# Altium PCB usbc-test-v1.PcbDoc (part 1 of 2)
Units mm, origin at the board's own origin, x right, y up, seen from the top; angles counter-clockwise.
Board outline 60 x 134.37 mm, 2 copper layers (Top Layer, Bottom Layer), stack 0.871 mm thick; 68 components, 63 nets, 626 pads, 262 vias.
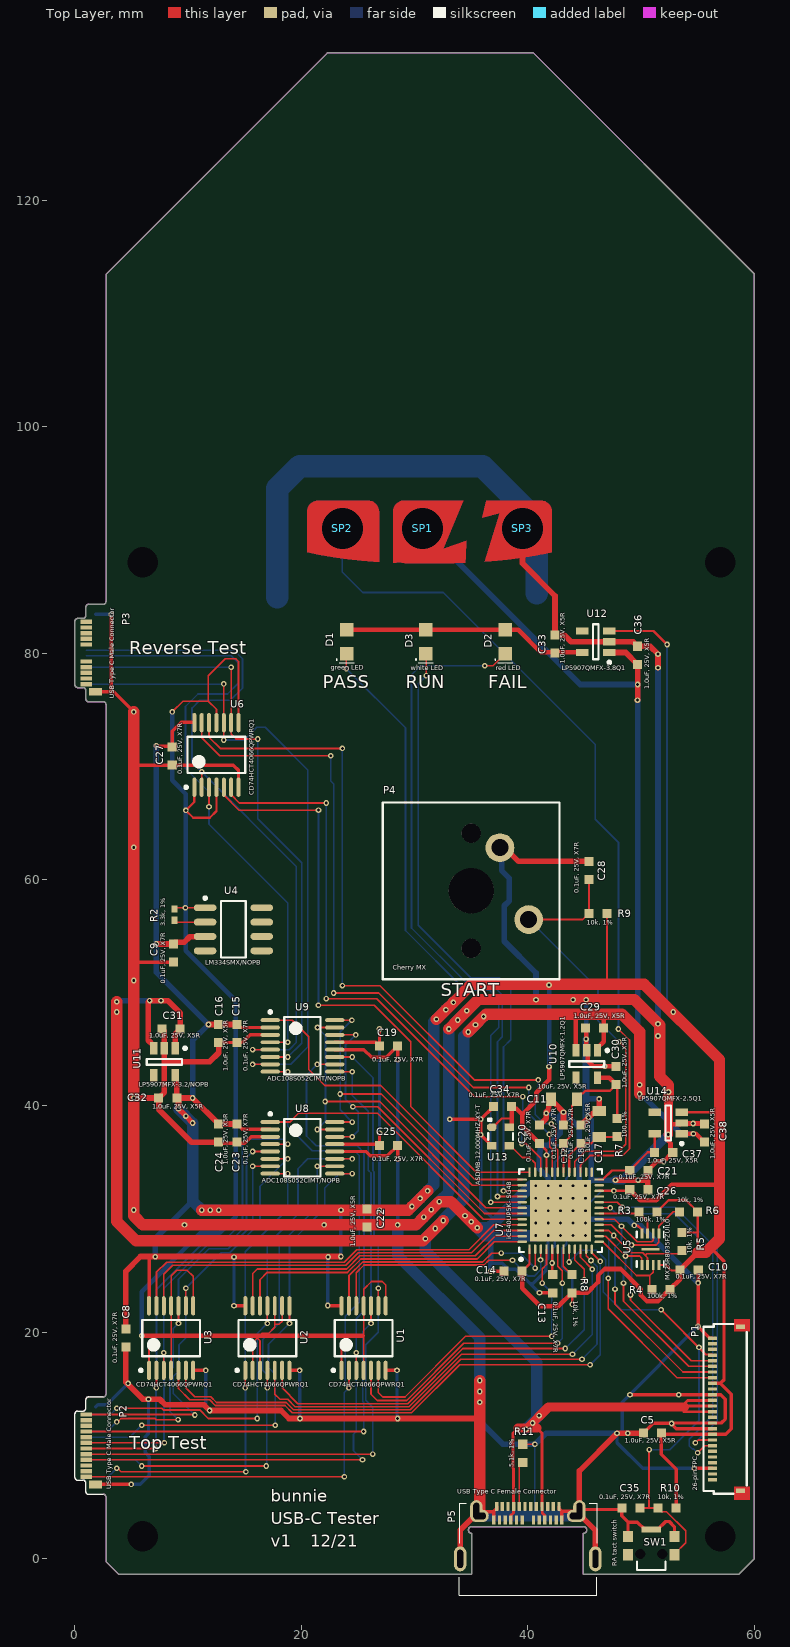
[diagram p0: Top Layer view]
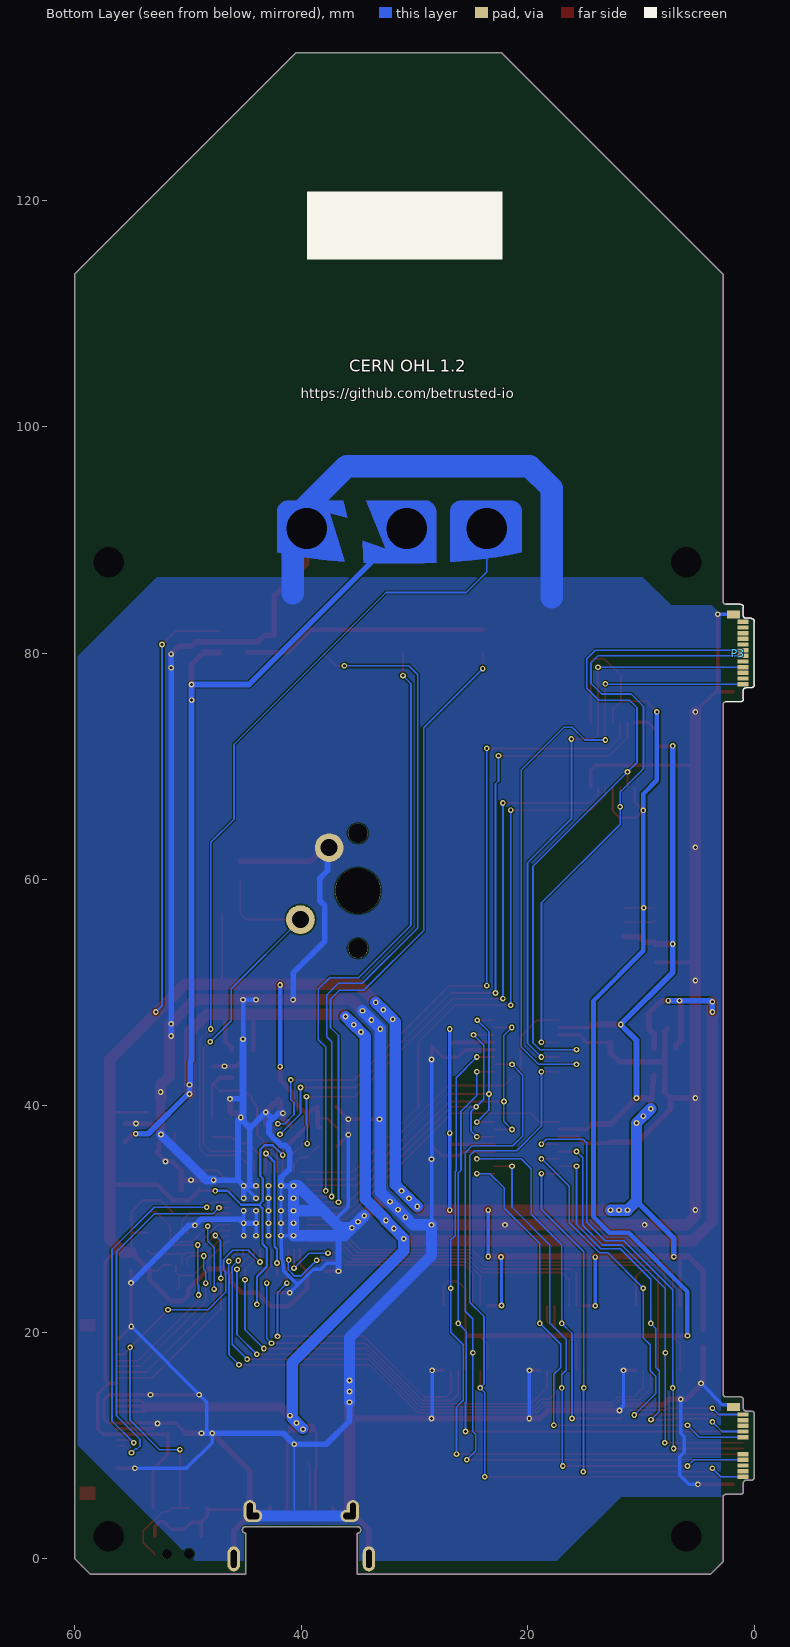
[diagram p1: Bottom Layer view, seen from below]

## Layer stack, top to bottom
Top Solder: solder mask 0.0102, Solder Resist, Dk 3.5
Top Layer: signal copper 0.0356
Dielectric 1: dielectric 0.8, FR-4, Dk 4.8
Bottom Layer: signal copper 0.0356
Bottom Solder: solder mask 0.0102, Solder Resist, Dk 3.5

## Board outline
0,7.2 ccw(c0.25,7.2) 0.25,6.95 0.71,6.95 cw(c0.71,6.7) 0.96,6.7 0.96,5.95 ccw(c1.21,5.95) 1.21,5.7 2.5,5.7 cw(c2.5,5.45) 2.75,5.45 2.75,-0.25 3.87,-1.37 35.06,-1.37 35.06,2.255 35.052,2.255 cw(c35.052,2.555) 35.052,2.855 35.06,2.855 39.98,2.855 44.9,2.855 44.908,2.855 cw(c44.908,2.555) 44.908,2.255 44.9,2.255 44.9,-1.37 58.63,-1.37 60,0 60,113.5 40.5,133 22.3,133 2.75,113.45 2.75,84.55 cw(c2.5,84.55) 2.5,84.3 1.22,84.3 1.21,84.3 ccw(c1.21,84.05) 0.96,84.05 0.96,83.3 cw(c0.71,83.3) 0.71,83.05 0.25,83.05 ccw(c0.25,82.8) 0,82.8 0,77.2 ccw(c0.25,77.2) 0.25,76.95 0.71,76.95 cw(c0.71,76.7) 0.96,76.7 0.96,75.95 ccw(c1.21,75.95) 1.21,75.7 2.5,75.7 cw(c2.5,75.45) 2.75,75.45 2.75,14.55 cw(c2.5,14.55) 2.5,14.3 1.22,14.3 1.21,14.3 ccw(c1.21,14.05) 0.96,14.05 0.96,13.3 cw(c0.71,13.3) 0.71,13.05 0.25,13.05 ccw(c0.25,12.8) 0,12.8

## Design rules (kind name [scope] priority, off if disabled: settings)
Clearance Clearance_1 [InNetClass('DP_90') vs InPolygon] p1: gap=1.5 ignorepadtopadclearanceinfootprint=FALSE except(0: Arc-Hole Track-Hole SMDPad-Hole THPad-Hole Via-Hole Fill-Hole Poly-Hole Region-Hole Text-Hole)
Clearance Clearance_2 [InNet('VBUS') and InPolygon] p2: gap=0.3 ignorepadtopadclearanceinfootprint=FALSE except(0: Arc-Hole Track-Hole SMDPad-Hole THPad-Hole Via-Hole Fill-Hole Poly-Hole Region-Hole Text-Hole)
Clearance [All] p3: gap=0.12 ignorepadtopadclearanceinfootprint=FALSE except(0: Arc-Hole Track-Hole SMDPad-Hole THPad-Hole Via-Hole Fill-Hole Poly-Hole Region-Hole Text-Hole)
DiffPairsRouting [All] p1: maxlimit=0.127 minlimit=0.127 mostfreqgap=0.127 toplayer_minwidth=0.3 toplayer_maxwidth=0.424 toplayer_prefwidth=0.424 bottomlayer_minwidth=0.3 bottomlayer_maxwidth=0.424 bottomlayer_prefwidth=0.424 impedanceprofiledriven=TRUE impedanceprofileid={7CC2B56F-1F2A-4501-830E-6975B203B65A} impedanceprofilevalue=90.000000 maxuncoupledlength=12.7
HoleSize [All] p1: absolutevalues=TRUE maxlimit=8 minlimit=0.025 maxpercent=80.000 minpercent=20.000
MinimumSolderMaskSliver [All] p1 off: minsoldermaskwidth=0.07
PolygonConnect [All] p1: connectstyle=Direct reliefconductorwidth=0.254 reliefentries=4 polygonreliefangle="90 Angle" airgapwidth=0.254
RoomDefinition tester [InComponentClass('tester')] p1 off: confinementstyle=ConfineIn formatcopy=TRUE lockcomponents=FALSE outline 80.01,20 81.661,20 81.661,14 80.01,14
RoutingVias [All] p1: holewidth=0.25 width=0.5 viastyle="Through Hole" minholewidth=0.25 minwidth=0.5 maxholewidth=1 maxwidth=2
SilkToSilkClearance [All] p1 off: silktosilkclearance=0.254
SilkToSolderMaskClearance [IsPad] p1 off: minsilkscreentomaskgap=0.254 clearancetoexposedcopper=TRUE
SolderMaskExpansion [All] p1: expansion=0.075 istentingtop=FALSE
Width [All] p1: maxlimit=5 minlimit=0.125 preferedwidth=0.15
25 further rules are at their usual default settings.

## Components (designator, comment, footprint, x,y, rotation, side; value= is the part's Value field where it differs from the comment)
C5 "1.0uF, 25V, X5R" B_CAP0603 51,11.1 r0 top
C8 "0.1uF, 25V, X7R" B_CAP0603 4.5,19.5 r270 top
C9 "0.1uF, 25V, X7R" B_CAP0603 8.7,53.5 r270 top
C10 "0.1uF, 25V, X7R" B_CAP0603 54.25,25.5 r0 top
C11 "10uF, 25V, X5R" B_CAP0805 43.2,40.6 r180 top
C12 "0.1uF, 25V, X7R" B_CAP0603 43.15,37.5 r90 top
C13 "0.1uF, 25V, X7R" B_CAP0603 42.2,24.3 r270 top
C14 "0.1uF, 25V, X7R" B_CAP0603 38.7,25.4 r180 top
C15 "0.1uF, 25V, X7R" B_CAP0603 14.3,46.4 r270 top
C16 "1.0uF, 25V, X5R" B_CAP0603 12.7,46.4 r90 top
C17 "10uF, 25V, X5R" B_CAP0805 46.3,38.4 r90 top
C18 "0.1uF, 25V, X7R" B_CAP0603 44.7,37.5 r90 top
C19 "0.1uF, 25V, X7R" B_CAP0603 27.7,45.3 r0 top
C20 "0.1uF, 25V, X7R" B_CAP0603 41.025,37.5 r90 top
C21 "0.1uF, 25V, X7R" B_CAP0603 49.8,34.3 r0 top
C22 "1.0uF, 25V, X5R" B_CAP0603 25.8,30.1 r90 top
C23 "0.1uF, 25V, X7R" B_CAP0603 14.3,37.6 r270 top
C24 "1.0uF, 25V, X5R" B_CAP0603 12.7,37.6 r90 top
C25 "0.1uF, 25V, X7R" B_CAP0603 27.7,36.5 r0 top
C26 "0.1uF, 25V, X7R" B_CAP0603 49.8,32.6 r0 top
C27 "0.1uF, 25V, X7R" B_CAP0603 8.6,70.9 r270 top
C28 "0.1uF, 25V, X7R" B_CAP0603 45.4,60.8 r90 top
C29 "1.0uF, 25V, X5R" B_CAP0603 45.9,46.9 r0 top
C30 "1.0uF, 25V, X5R" B_CAP0603 47.8,42.7 r270 top
C31 "1.0uF, 25V, X5R" B_CAP0603 8.5,46.8 r0 top
C32 "1.0uF, 25V, X5R" B_CAP0603 8.2,40.7 r0 top
C33 "1.0uF, 25V, X5R" B_CAP0603 42.4,80.8 r270 top
C34 "0.1uF, 25V, X7R" B_CAP0603 37.775,39.95 r180 top
C35 "0.1uF, 25V, X7R" B_CAP0603 49.1,4.5 r180 top
C36 "1.0uF, 25V, X5R" B_CAP0603 49.7,79.8 r270 top
C37 "1.0uF, 25V, X5R" B_CAP0603 52,35.9 r180 top
C38 "1.0uF, 25V, X5R" B_CAP0603 55.6,37.6 r270 top
D1 "green LED" B_LED0805 24,81 r90 top
D2 "red LED" B_LED0805 38,81 r90 top
D3 "white LED" B_LED0805 31,81 r90 top
P1 "26-pin FPC" HRS_FH34SRJ-26S-0.5SH(50) 56.3,13.25 r90 top
P2 "USB Type C Male Connector" MOLEX_1054440001 0,10 r90 top
P3 "USB Type C Male Connector" MOLEX_1054440001 0,80 r270 bottom
P4 "Cherry MX" CHERRY_MX_BASIC 35,59 r270 top
P5 "USB Type C Female Connector" TE_1-2295018-2 40,0 r0 top
R2 "3.3k, 1%" B_RES0402 8.8,56.9 r270 top
R3 "100k, 1%" B_RES0603 50.6,30.65 r180 top
R4 "100k, 1%" B_RES0603 51.75,23.8 r180 top
R5 "10k, 1%" B_RES0603 53.6,28.025 r270 top
R6 "10k, 1%" B_RES0603 54.2,30.65 r180 top
R7 "100, 1%" B_RES0603 47.9,38.1 r270 top
R8 "10k, 1%" B_RES0603 43.9,24.3 r90 top
R9 "10k, 1%" B_RES0603 46.2,57 r180 top
R10 "10k, 1%" B_RES0603 52.3,4.5 r180 top
R11 "5.1k, 1%" B_RES0603 39.55,9.325 r270 top
SP1 "sticker pad (DNP)" TP_SMT_38mil 30.7,91 r90 top
SP2 "sticker pad (DNP)" TP_SMT_38mil 23.625,91 r90 top
SP3 "sticker pad (DNP)" TP_SMT_38mil 39.525,91 r90 top
SW1 "RA tact switch" CK_KMS221GPLFS 50.9,-0.125 r0 top
U1 "CD74HCT4066QPWRQ1" TSOP65P640-14AN 25.5,19.5 r90 top
U2 "CD74HCT4066QPWRQ1" TSOP65P640-14AN 17,19.5 r90 top
U3 "CD74HCT4066QPWRQ1" TSOP65P640-14AN 8.5,19.5 r90 top
U4 "LM334SMX/NOPB" SOIC127P600-8AN 14,55.6 r0 top
U5 "MX25R8035FZUIL0" USON-8 50.825,27.35 r270 top
U6 "CD74HCT4066QPWRQ1" TSOP65P640-14AN 12.5,71 r90 top
U7 "iCE40UP5K- SG48" UP5K_QFN127P600-8N 42.9,30.75 r90 top
U8 "ADC108S052CIMT/NOPB" SOP65P640-16N 20.1,36.3 r0 top
U9 "ADC108S052CIMT/NOPB" SOP65P640-16N 20.1,45.3 r0 top
U10 "LP5907QMFX-1.2Q1" SOT23-5AN 45.2,43.7 r270 top
U11 "LP5907MFX-3.2/NOPB" SOT23-5AN 7.9,43.9 r270 top
U12 "LP5907QMFX-3.8Q1" SOT23-5AN 46,81 r180 top
U13 "ASDMB-12.000MHZ-XY-T" ABRACON_ASDMB 37.6,37.3 r270 top
U14 "LP5907QMFX-2.5Q1" SOT23-5AN 52.4,38.5 r180 top

## Footprints (in the part's own frame and the unit in brackets; to place one, negate y for a bottom-side part, rotate by r counter-clockwise, add the part's x,y. Pads: shape width x height; smd on the part's side, far side on the other; paste and mask are expansions set on the pad)
ABRACON_ASDMB [mm] "Abracon Miniature Pure Silicon Clock Oscillator"
  oct 0.65x0.85 smd mask+0.07: 1(-0.825,-0.775)
  rect 0.65x0.85 smd mask+0.07: 2(0.825,-0.775) 3(0.825,0.775) 4(-0.825,0.775)
  silkscreen extent -1.6,-1.1 0.3,1.1, body extent -1.25,-1 1.25,1, height 0.85
B_CAP0603 [mm] "Capacitor 0603"
  rect 0.8x0.8 smd mask+0.07: 1(-0.8,0) 2(0.8,0)
  body extent -0.85,-0.45 0.85,0.45, height 0.9
B_CAP0805 [mm] "Capacitor 0805"
  rect 0.9x1.2 smd: 1(-1.15,0) 2(1.15,0)
  body extent -1.1,-0.7 1.1,0.7, height 0.6
B_LED0805 [mm] "Molded Diode, 2-Leads, Body 2.00x1.25mm, IPC Medium Density"
  rect 1.2x1.2 smd mask+0.07: 1(1.05,0) 2(-1.05,0)
  silkscreen extent -1.85,-0.65 -1.53,0.92, body extent -1,-0.63 1,0.63, height 0.8
B_RES0402 [mm] "Resistor 0402"
  rect 0.63x0.55 smd mask+0.07: 1(-0.5,0) 2(0.5,0)
  body extent -0.53,-0.27 0.53,0.28, height 0.4
B_RES0603 [mm] "Resistor 0603"
  rect 0.8x0.8 smd mask+0.07: 1(-0.8,0) 2(0.8,0)
  body extent -0.85,-0.45 0.85,0.45, height 0.9
CHERRY_MX_BASIC [mil] "Cherry MX key switch with fixation pins"
  round 67 hole 67 unplated: 0(-200,0) 0(200,0)
  round 157 hole 157 unplated: 0(0,0)
  round 100 hole 59: 1(-150,100) 2(100,200)
  silkscreen extent -307,-307 307,307, body extent -307,-307 307,307, height 610
CK_KMS221GPLFS [mm] "RA tact switch gull wing with pegs"
  round 0.8 hole 0.9 unplated mask+0.07: 0(-0.975,0.55) 0(0.975,0.55)
  rect 0.9x1 smd mask+0.07: 1(-2.05,0.5) 2(-2.05,2.1) 4(2.05,2.1) 5(2.05,0.5)
  rect 1.7x0.55 smd mask+0.07: 3(0,2.725)
  silkscreen extent -1.25,-0.85 1.25,-0.13, body extent -2.3,-0.85 2.3,2.7, height 1.42
HRS_FH34SRJ-26S-0.5SH(50) [mm] "Top/bottom entry, back-lock 0.3mm thick FPC, 26 pins"
  rect 0.4x0.8 smd mask+0.07: 0(-7.25,-2.5) 0(7.25,-2.5)
  rect 0.3x0.8 smd mask+0.07: 1(6.25,0) 2(5.75,0) 3(5.25,0) 4(4.75,0) 5(4.25,0) 6(3.75,0) 7(3.25,0) 8(2.75,0) 9(2.25,0) 10(1.75,0) 11(1.25,0) 12(0.75,0) 13(0.25,0) 14(-0.25,0) 15(-0.75,0) 16(-1.25,0) 17(-1.75,0) 18(-2.25,0) 19(-2.75,0) 20(-3.25,0) 21(-3.75,0) 22(-4.25,0) 23(-4.75,0) 24(-5.25,0) 25(-5.75,0) 26(-6.25,0)
  silkscreen extent -7.5,-3.03 7.5,0.77, body extent -7.5,-3.03 7.5,0.78, height 1
MOLEX_1054440001 [mm] "USB C Plug, splint"
  rect 0.7x1.15 smd mask+0.05: 0(-3.42,-1.84)
  rect 0.7x1.15 smd far side mask+0.05: 0(3.42,-1.84)
  rect 0.38x1 smd mask+0.05: A1(-2.75,-1) A2(-2.25,-1) A3(-1.75,-1) A4(-1.25,-1) A5(-0.75,-1) A6(-0.25,-1) A7(0.25,-1) A8(0.75,-1) A9(1.25,-1) A10(1.75,-1) A11(2.25,-1) A12(2.75,-1)
  rect 0.38x1 smd far side mask+0.05: B1(2.75,-1) B2(2.25,-1) B3(1.75,-1) B4(1.25,-1) B5(0.75,-1) B8(-0.75,-1) B9(-1.25,-1) B10(-1.75,-1) B11(-2.25,-1) B12(-2.75,-1)
  silkscreen extent -4.3,-2.5 4.3,0, body extent -4.59,-2.02 4.59,10.02, height 1.34
SOIC127P600-8AN [mm] "SOIC, 8-Leads, Body 4.9x3.9mm, Pitch 1.27mm, IPC Medium Density"
  oval 2x0.6 smd: 1(-2.5,1.905) 2(-2.5,0.635) 3(-2.5,-0.635) 4(-2.5,-1.905) 5(2.5,-1.905) 6(2.5,-0.635) 7(2.5,0.635) 8(2.5,1.905)
  silkscreen extent -2.62,-2.5 1.1,2.88, body extent -2,-2.5 2,2.5, height 2.72
SOP65P640-16N [mm] "SOP, 16-Leads, Body 5x4.4mm, Pitch 0.65mm, IPC Medium Density"
  oval 1.7x0.35 smd: 1(-2.85,2.275) 2(-2.85,1.625) 3(-2.85,0.975) 4(-2.85,0.325) 5(-2.85,-0.325) 6(-2.85,-0.975) 7(-2.85,-1.625) 8(-2.85,-2.275) 9(2.85,-2.275) 10(2.85,-1.625) 11(2.85,-0.975) 12(2.85,-0.325) 13(2.85,0.325) 14(2.85,0.975) 15(2.85,1.625) 16(2.85,2.275)
  silkscreen extent -2.97,-2.55 1.6,3.12, body extent -2.25,-2.55 2.25,2.55, height 2
SOT23-5AN [mm] "SOT23, 5-Leads, Body 2.9x1.6mm, Pitch 0.95mm, Lead Span 2.8mm, IPC Medium Density"
  rect 1.1x0.65 smd mask+0.075: 1(-1.2,0.95) 2(-1.2,0) 3(-1.2,-0.95) 4(1.2,-0.95) 5(1.2,0.95)
  silkscreen extent -1.32,-1.55 0.25,1.95, body extent -0.9,-1.55 0.9,1.55, height 1.45
TE_1-2295018-2 [mm] "USB-C receptacle 24 position board cutout"
  oval 1.1x1.95 hole 0.5 slot 1.45 at 90 deg mask+0.07: 0(-4.55,4.22) 0(4.55,4.22)
  oval 1.6x1.1 hole 0.6 slot 1.1 at 0 deg mask+0.07: 0(-4.25,3.792) 0(4.25,3.792)
  rect 0.3x0.8 smd mask+0.07: A1(-2.75,4.63) A2(-2.25,4.63) A3(-1.75,4.63) A4(-1.25,4.63) A5(-0.75,4.63) A6(-0.25,4.63) A7(0.25,4.63) A8(0.75,4.63) A9(1.25,4.63) A10(1.75,4.63) A11(2.25,4.63) A12(2.75,4.63) B1(3,3.43) B2(2.5,3.43) B3(2,3.43) B4(1.5,3.43) B5(1,3.43) B6(0.5,3.43) B7(-0.5,3.43) B8(-1,3.43) B9(-1.5,3.43) B10(-2,3.43) B11(-2.5,3.43) B12(-3,3.43)
  oval 1.1x2.2 hole 0.5 slot 1.6 at 90 deg mask+0.07: MID(-5.97,0) MID(5.97,0)
  silkscreen extent -6.08,-3.2 6.07,4.9, body extent -6.07,-3.2 6.07,4.9, height 2.45
TP_SMT_38mil [mil] "38 mil round test point, SMT"
  round 38 smd: 1(0,0)
TSOP65P640-14AN [mm] "TSOP, 14-Leads, Body 5x4.4mm, Pitch 0.65mm, IPC Medium Density"
  oval 1.7x0.35 smd: 1(-2.85,1.95) 2(-2.85,1.3) 3(-2.85,0.65) 4(-2.85,0) 5(-2.85,-0.65) 6(-2.85,-1.3) 7(-2.85,-1.95) 8(2.85,-1.95) 9(2.85,-1.3) 10(2.85,-0.65) 11(2.85,0) 12(2.85,0.65) 13(2.85,1.3) 14(2.85,1.95)
  silkscreen extent -2.97,-2.55 1.6,2.8, body extent -2.25,-2.55 2.25,2.55, height 1.2
UP5K_QFN127P600-8N [mm]
  oval 0.85x0.2 smd: 1(-3.4,2.75) 2(-3.4,2.25) 3(-3.4,1.75) 4(-3.4,1.25) 5(-3.4,0.75) 6(-3.4,0.25) 7(-3.4,-0.25) 8(-3.4,-0.75) 9(-3.4,-1.25) 10(-3.4,-1.75) 11(-3.4,-2.25) 12(-3.4,-2.75) 25(3.4,-2.75) 26(3.4,-2.25) 27(3.4,-1.75) 28(3.4,-1.25) 29(3.4,-0.75) 30(3.4,-0.25) 31(3.4,0.25) 32(3.4,0.75) 33(3.4,1.25) 34(3.4,1.75) 35(3.4,2.25) 36(3.4,2.75)
  oval 0.2x0.85 smd: 13(-2.75,-3.4) 14(-2.25,-3.4) 15(-1.75,-3.4) 16(-1.25,-3.4) 17(-0.75,-3.4) 18(-0.25,-3.4) 19(0.25,-3.4) 20(0.75,-3.4) 21(1.25,-3.4) 22(1.75,-3.4) 23(2.25,-3.4) 24(2.75,-3.4) 37(2.75,3.4) 38(2.25,3.4) 39(1.75,3.4) 40(1.25,3.4) 41(0.75,3.4) 42(0.25,3.4) 43(-0.25,3.4) 44(-0.75,3.4) 45(-1.25,3.4) 46(-1.75,3.4) 47(-2.25,3.4) 48(-2.75,3.4)
  rect 5.4x5.4 smd: PADDLE(0,0)
  silkscreen extent -4.42,-3.65 3.65,3.65, body extent -3.5,-3.5 3.5,3.5, height 1
USON-8 [mm] "SON, 8-Leads, Body 2.00x3.00mm, Pitch 0.50mm, Thermal Pad 1.60x0.20mm, IPC Medium Density"
  rect 0.9x0.25 smd mask+0.07: 1(-1.395,0.75) 2(-1.395,0.25) 3(-1.395,-0.25) 4(-1.395,-0.75) 5(1.395,-0.75) 6(1.395,-0.25) 7(1.395,0.25) 8(1.395,0.75)
  rect 0.2x1.6 smd mask+0.07: 9(0,0)
  silkscreen extent -2,-1.2 1.55,1.25, body extent -1.55,-1.05 1.55,1.05, height 0.6

## Part data
C5 C16 C22 C24 C29 C30 C31 C32 C33 C36 C37 C38: library part "Cap Semi", "Capacitor (Semiconductor SIM Model)", MPN=CL10A105KA8NNNC, MYPN=C-105-25-X5R-0603, VENDOR=Samsung
C8 C9 C10 C12 C13 C14 C15 C18 C19 C20 C21 C23 C25 C26 C27 C28 C34 C35: library part "Cap Semi", "Capacitor (Semiconductor SIM Model)", MPN=CC0603KRX7R8BB104, MYPN=C-104-25-X7R-0603, VENDOR=Murata
C11 C17: library part "Cap Semi", "Capacitor (Semiconductor SIM Model)", MPN=GRM21BR61E106KA73L, MYPN=C-106-25-X5R-0805, VENDOR=Murata
D1: library part LED2, "Typical RED, GREEN, YELLOW, AMBER GaAs LED", MPN=IN-S85ATG, MYPN=D-LED-GREEN1-0805, VENDOR=Inolux
D2: library part LED2, "Typical RED, GREEN, YELLOW, AMBER GaAs LED", MPN=IN-S85ATR, MYPN=D-LED-RED1-0805, VENDOR=Inolux
D3: library part LED2, "Typical RED, GREEN, YELLOW, AMBER GaAs LED", MPN=IN-S85AT5UW, MYPN=D-LED-WHITE1-0805, VENDOR=Inolux
P1: library part FPC-26, "26 Pin FPC header", MPN=FH34SRJ-26S-0.5SH(99), MYPN=J-FPC-0.5mm-26-0.3mm-T/B, VENDOR=Hirose
P2 P3: library part USB_TYPE_C, "USB Type C Connector", MPN=1054440011, MYPN=P-1054440001, VENDOR=Molex
P4: library part "Header 2", "Header, 2-Pin", MPN=MX1A-E1NN, LatestRevisionDate=17-Jul-2002, LatestRevisionNote="Re-released for DXP Platform.", MYPN=SW-EVQ-P6DB35, Publisher="Altium Limited", VENDOR=Cherry
P5: library part USB_TYPE_C, "USB Type C Connector", MPN=1-2295018-2, MYPN=P-1-2295018-2, VENDOR="TE Connectivity AMP Connectors"
R2 R3 R4 R7: library part Res1, "Resistor", MPN=TBD, VENDOR=Yageo
  R2: MYPN=R-332-1P-1_16W-0402
  R3 R4: MYPN=R-104-1P-1_16W-0603
  R7: MYPN=R-101-1P-1_16W-0603
R5 R6 R8 R9 R10: library part Res1, "Resistor", MPN=RC0603FR-0710KL, MYPN=R-103-1P-1_16W-0603, VENDOR=Yageo
R11: library part Res1, "Resistor", MPN=RC0603FR-075K1L, MYPN=R-512-1P-1_16W-0603, VENDOR=Yageo
SP1 SP2 SP3: library part CON1, "Connector"
SW1: library part "Header 5", MPN=KMS221GPLFS, LatestRevisionDate=17-Jul-2002, LatestRevisionNote="Re-released for DXP Platform.", MYPN=SW-KMS221GPLFS, Publisher="Altium Limited", VENDOR=C&K
U1 U2 U3 U6: library part 74HC4066, "4-channel analog mux", MPN=CD74HCT4066QPWRQ1, VENDOR=TI
U4: library part LMx34, "LM134/234/334 3-terminal adjustable current sources", MPN=LM334SMX/NOPB, VENDOR=TI
U5: library part EN25P05-50GCP, "64Mbit SPI NOR FLASH", MPN=MX25R8035FZUIL0, MYPN=UMX25R8035FZUIL0, VENDOR=Macronix
U7: MPN=ICE40UP5K-SG48I, MYPN=U-ICE40UP5K-SG48I, VENDOR=Lattice
U8 U9: library part ADCxx8Sxx2, "12-input SPI ADC, bits & sample rate pin compatible across family", MPN=ADC088S022CIMT/NOPB-ND, VENDOR=TI
U10 U11 U12 U14: library part LP5907QMFX-XX, "Ultra low-noise 250mA LDO for RF and analog in SOT23-5", MPN=LP5907UVX-#.#/NOPB, MYPN=ULP5907UVX-#.#/NOPB, VENDOR=TI
U13: library part OSCILLATOR, "Abracon ASDMB Miniature Oscillator", MPN=ASDMB-12.000MHZ-XY-T, MYPN=U-ASDMB-12MHz, VENDOR="Abracon LLC"

## Free pads (board coordinates)
  round 0 hole 2.7 unplated mask+2.5: 0(6,88) 2(57,2) 3(6,2) 4(57,88)
  round 1.8 hole 3.6 mask+0.07: 0(23.625,91) 0(30.7,91) 0(39.525,91)
  round 5.5 on Top Solder: 0(57,2) 5(6,2) 6(6,88) 7(57,88)
  rect 2.489x0.051 on Bottom Overlay: 1(28.472,109.495) 1(28.472,109.545) 1(28.472,109.444) 1(30.758,111.831)
  rect 2.54x0.051 on Bottom Overlay: 1(28.497,109.19) 1(28.497,109.291) 1(28.497,109.342) 1(28.497,109.393) 1(28.497,109.596) 1(28.497,109.698) 1(28.497,109.749) 1(28.497,109.241) 1(28.497,109.647) 1(28.497,109.799) 1(28.599,110.003) 1(32.917,110.003) 1(33.019,109.241) 1(33.019,109.291) 1(33.019,109.342) 1(33.019,109.393) 1(33.019,109.444) 1(33.019,109.495) 1(33.019,109.545) 1(33.019,109.596) 1(33.019,109.647) 1(33.019,109.698) 1(33.019,109.749) 1(33.019,109.799)
  rect 2.591x0.051 on Bottom Overlay: 1(28.523,109.088) 1(28.523,109.139) 1(28.523,109.85) 1(28.523,109.901) 1(28.523,109.952) 1(28.574,109.037) 1(32.942,109.037) 1(32.993,109.139) 1(32.993,109.19) 1(32.993,109.901) 1(32.993,109.088) 1(32.993,109.85)
  rect 0.102x0.051 on Bottom Overlay: 1(28.599,112.289) 1(29.666,107.056) 1(31.85,107.056) 1(32.917,112.289)
  rect 0.254x0.051 on Bottom Overlay: 1(28.624,106.802) 1(28.624,112.238) 1(29.64,107.107) 1(31.876,107.107) 1(32.892,106.802) 1(32.892,112.238)
  rect 0.356x0.051 on Bottom Overlay: 1(28.624,106.853) 1(28.624,112.187) 1(29.59,107.158) 1(31.926,107.158) 1(32.892,112.187)
  rect 0.152x0.051 on Bottom Overlay: 1(28.624,106.751) 1(32.892,106.751)
  rect 0.457x0.051 on Bottom Overlay: 1(28.624,112.136)
  rect 0.508x0.051 on Bottom Overlay: 1(28.65,106.904) 1(32.866,106.904) 1(32.866,112.136)
  rect 0.61x0.051 on Bottom Overlay: 1(28.65,106.955) 1(28.65,112.085) 1(32.866,112.085)
  rect 0.711x0.051 on Bottom Overlay: 1(28.65,112.035)
  rect 0.864x0.051 on Bottom Overlay: 1(28.675,107.056) 1(28.675,111.984) 1(30.758,113.051) 1(32.841,107.056) 1(32.841,111.984)
  rect 0.965x0.051 on Bottom Overlay: 1(28.675,111.933) 1(30.758,112.898) 1(30.758,112.949) 1(30.758,113) 1(32.841,111.933)
  rect 0.762x0.051 on Bottom Overlay: 1(28.675,107.005) 1(32.841,107.005) 1(32.841,112.035)
  rect 1.016x0.051 on Bottom Overlay: 1(28.701,107.107) 1(30.733,112.847) 1(32.815,107.107)
  rect 2.337x0.051 on Bottom Overlay: 1(28.701,108.987) 1(29.463,110.511) 1(32.815,108.987)
  rect 1.219x0.051 on Bottom Overlay: 1(28.701,111.831) 1(30.733,112.289) 1(32.815,111.831)
  rect 1.118x0.051 on Bottom Overlay: 1(28.701,111.882) 1(28.701,107.158) 1(30.733,112.543) 1(32.815,107.158) 1(32.815,111.882)
  rect 2.286x0.051 on Bottom Overlay: 1(28.726,110.053) 1(32.028,110.511) 1(32.739,110.053)
  rect 2.134x0.051 on Bottom Overlay: 1(28.853,108.936) 1(29.361,110.46) 1(32.155,110.46) 1(32.663,108.936)
  rect 1.829x0.051 on Bottom Overlay: 1(28.904,107.31) 1(29.005,107.564) 1(29.056,107.666) 1(29.056,108.834) 1(29.056,110.155) 1(29.107,108.783) 1(29.107,110.206) 1(29.31,108.225) 1(29.31,108.275) 1(32.206,108.225) 1(32.206,108.275) 1(32.358,110.257) 1(32.409,107.717) 1(32.409,108.783) 1(32.409,108.834) 1(32.409,110.206) 1(32.46,107.615) 1(32.46,107.666) 1(32.46,110.155) 1(32.511,107.564) 1(32.612,107.31)
  rect 1.93x0.051 on Bottom Overlay: 1(28.904,107.361) 1(29.209,108.682) 1(29.209,110.358) 1(29.31,108.377) 1(29.31,108.428) 1(32.206,108.377) 1(32.206,108.428) 1(32.307,108.682) 1(32.307,110.358) 1(32.358,108.733) 1(32.612,107.361)
  rect 2.032x0.051 on Bottom Overlay: 1(28.904,110.104) 1(29.259,108.58) 1(29.31,108.479) 1(29.31,108.529) 1(32.206,108.479) 1(32.206,108.529) 1(32.206,108.58) 1(32.612,110.104)
  rect 1.676x0.051 on Bottom Overlay: 1(28.929,107.209) 1(29.285,108.072)
  rect 1.778x0.051 on Bottom Overlay: 1(28.929,107.259) 1(29.082,107.717) 1(29.132,107.767) 1(29.132,107.818) 1(29.183,107.869) 1(29.234,107.971) 1(32.282,107.971) 1(32.333,107.869) 1(32.384,107.767) 1(32.384,107.818) 1(32.587,107.259)
  rect 1.88x0.051 on Bottom Overlay: 1(28.929,107.412) 1(28.929,107.463) 1(28.98,107.513) 1(29.031,107.615) 1(29.031,108.885) 1(29.132,108.733) 1(29.132,110.257) 1(29.183,110.307) 1(29.285,108.326) 1(32.18,108.326) 1(32.333,110.307) 1(32.485,108.885) 1(32.536,107.463) 1(32.536,107.513) 1(32.587,107.412)
  rect 1.727x0.051 on Bottom Overlay: 1(29.209,107.92) 1(29.259,108.021) 1(29.31,108.123) 1(29.31,108.174) 1(30.733,111.984) 1(32.206,108.072) 1(32.206,108.123) 1(32.206,108.174) 1(32.257,108.021) 1(32.307,107.92) 1(32.561,107.209)
  rect 1.981x0.051 on Bottom Overlay: 1(29.234,108.631) 1(29.285,110.409) 1(30.758,111.933) 1(32.231,110.409) 1(32.282,108.631)
  rect 4.674x0.051 on Bottom Overlay: 1(30.733,110.968)
  rect 5.08x0.051 on Bottom Overlay: 1(30.733,111.273)
  rect 4.877x0.051 on Bottom Overlay: 1(30.733,111.12)
  rect 4.826x0.051 on Bottom Overlay: 1(30.758,110.561) 1(30.758,110.612) 1(30.758,111.069)
  rect 4.724x0.051 on Bottom Overlay: 1(30.758,110.663) 1(30.758,111.019) 1(30.758,110.714)
  rect 4.623x0.051 on Bottom Overlay: 1(30.758,110.815) 1(30.758,110.866) 1(30.758,110.917) 1(30.758,110.765)
  rect 5.029x0.051 on Bottom Overlay: 1(30.758,111.222)
  rect 5.131x0.051 on Bottom Overlay: 1(30.758,111.323)
  rect 5.232x0.051 on Bottom Overlay: 1(30.758,111.374)
  rect 5.334x0.051 on Bottom Overlay: 1(30.758,111.425) 1(30.758,111.476)
  rect 5.537x0.051 on Bottom Overlay: 1(30.758,111.577) 1(30.758,111.628) 1(30.758,111.73)
  rect 5.639x0.051 on Bottom Overlay: 1(30.758,111.679)
  rect 5.436x0.051 on Bottom Overlay: 1(30.758,111.781) 1(30.758,111.527)
  rect 1.473x0.051 on Bottom Overlay: 1(30.758,112.035)
  rect 1.27x0.051 on Bottom Overlay: 1(30.758,112.085) 1(30.758,112.136) 1(30.758,112.187) 1(30.758,112.238)
  rect 1.168x0.051 on Bottom Overlay: 1(30.758,112.339) 1(30.758,112.39) 1(30.758,112.441) 1(30.758,112.492)
  rect 1.067x0.051 on Bottom Overlay: 1(30.758,112.695) 1(30.758,112.746) 1(30.758,112.797) 1(30.758,112.593) 1(30.758,112.644)
  rect 4.928x0.051 on Bottom Overlay: 1(30.758,111.171)
  rect 2.184x0.051 on Bottom Overlay: 1(30.758,111.882)
  rect 0.66x0.051 on Bottom Overlay: 1(32.841,106.955)
  rect 0.406x0.051 on Bottom Overlay: 1(32.866,106.853)
  rect 2.642x0.051 on Bottom Overlay: 1(32.968,109.952)

## Via types
v1: diameter 0.5, hole 0.25, Top Layer to Bottom Layer, tented both sides, 237 vias
v2: diameter 0.5, hole 0.25, Top Layer to Bottom Layer, 25 vias

## Nets (pads, with @x,y where several pads share a name; then routed paths per layer and width w, separated by ;. In a path a pad name is that pad's centre, name@x,y a point inside that pad or via, vN(x,y) a via of type N, cw(c..) or ccw(c..) an arc to the next point about the centre after c; other vN are vias at no path point)
ADC0_CS_N: U7.44 U8.1 | length 26.4
  Top Layer w0.15: U8.1@17.25,38.575 18.975,38.575 19.75,39.35 26.726,39.35 36.076,30 U7.44@39.5,30
ADC1_CS_N: U7.37 U9.1 | length 29.8
  Top Layer w0.15: U9.1@17.25,47.575 19.2,47.575 20.65,46.125 20.65,43.225 22.075,41.8 27.025,41.8 35.325,33.5 U7.37@39.5,33.5
ADC_DIN: U7.43 U8.14 U9.14 | length 32.3
  Top Layer w0.15: U8.14@22.95,37.275 v1(24.5,37.275) ; U9.14@22.95,46.275 v1(24.8,46.275) ; v1(24.55,39.925) 26.75,39.925 36.175,30.5 U7.43@39.5,30.5
  Bottom Layer w0.15: v1(24.5,37.275) 25.025,37.8 25.025,39.475 23.9,40.6 23.9,45.375 v1(24.8,46.275)
ADC_DOUT: U7.42 U8.15 U9.15 | length 34
  Top Layer w0.15: v1(21.4,37.925) U8.15@22.95,37.925 ; v1(21.425,46.925) U9.15@22.95,46.925 ; v1(22.1,40.4) 26.9,40.4 36.3,31 U7.42@39.5,31
  Bottom Layer w0.15: v1(21.4,37.925) 22.125,38.65 22.125,46.225 v1(21.425,46.925)
ADC_SCLK: U7.38 U8.16 U9.16 | length 32.3
  Top Layer w0.15: U8.16@22.95,38.575 v1(24.5,38.575) ; U9.16@22.95,47.575 v1(24.461,47.575) ; v1(23.425,41.05) 27.05,41.05 35.1,33 U7.38@39.5,33
  Bottom Layer w0.15: v1(24.461,47.575) 23.425,46.539 v1(23.425,41.05) 23.425,39.65 v1(24.5,38.575)
CC1_A5: P2.A5 U1.9 U9.11 | length 65.1
  Top Layer w0.15: P2.A5@1,9.25 v1(26.3,9.25) ; U9.11@22.95,44.325 v1(24.5,44.325) ; U1.9@26.8,22.35 v1(26.8,23.9)
  Bottom Layer w0.15: v1(24.5,44.325) 26.325,42.5 26.325,34.282 26.42,34.187 26.42,28.555 26.8,28.175 v1(26.8,23.9) 26.8,20 25.7,18.9 25.7,14 26.3,13.4 v1(26.3,9.25)
CC2_B5: P2.B5 U2.8 U8.9 | length 46.4
  Top Layer w0.15: v1(5.9,11.8) v1(17.7,11.8) ; v1(18.95,20.8) U2.8@18.95,22.35 ; U8.9@22.95,34.025 v1(24.5,34.025)
  Bottom Layer w0.15: P2.B5@1,10.75 4.85,10.75 v1(5.9,11.8) ; v1(17.7,11.8) 17.7,16.3 17.1,16.9 17.1,18.95 v1(18.95,20.8) 18.95,27.85 22.075,30.975 22.075,32.75 23.35,34.025 v1(24.5,34.025)
CDONE: R8.2 U7.7 | length 2.6
  Top Layer w0.125: U7.7@43.15,27.35 43.15,25.85 R8.2@43.9,25.1
CRESET_B: C35.1 P1.4 R10.2 SW1.5 U7.8 | length 44.5
  Top Layer w0.15: v1(43.65,26.225) U7.8@43.65,27.35 ; C35.1@49.9,4.5 50.7,4.5 ; v1(50.725,9.65) 50.7,9.625 50.7,4.5 ; SW1.5@52.95,0.375 52.95,0.425 53.95,1.425 53.95,2.475 52.25,4.175 51.825,4.175 R10.2@51.5,4.5 50.7,4.5
  Top Layer w0.2: v1(51.775,22) 55.725,18.05 56.25,18.05 P1.4@56.3,18
  Bottom Layer w0.15: v1(43.65,26.225) 44.675,27.25 46.054,27.25 46.875,26.429 46.875,25.525 46.7,25.35 46.7,24.997 46.664,24.961 46.664,24.536 46.675,24.525 46.675,23.575 48.25,22 v1(51.775,22) ; v1(50.725,9.65) 52.525,9.65 55.125,12.25 v1(55.125,18.675)
D1_N_A7: P2.A7 U3.3 U8.5 | length 40
  Top Layer w0.15: P2.A7@1,10.25 v1(7.9,10.25) ; U3.3@7.85,16.65 v1(7.85,18.2) ; v1(15.7,35.975) U8.5@17.25,35.975
  Bottom Layer w0.15: v1(7.9,10.25) 7.875,10.275 7.875,18.175 v1(7.85,18.2) 7.85,23.875 11.7,27.725 13.4,27.725 15.154,29.479 15.154,35.429 v1(15.7,35.975)
D1_P_A6: P2.A6 U3.2 U8.4 | length 44.7
  Top Layer w0.15: P2.A6@1,9.75 v1(7.125,9.75) ; v1(7.2,15.1) U3.2@7.2,16.65 ; U8.4@17.25,36.625 v1(18.8,36.625)
  Bottom Layer w0.15: v1(7.125,9.75) 7.163,9.787 7.163,15.063 v1(7.2,15.1) 7.2,23.775 11.525,28.1 13.175,28.1 14.8,29.725 14.8,36.75 15.1,37.05 18.375,37.05 v1(18.8,36.625)
D2_N_A7: P3.A7 U6.3 U9.4 | length 57.6
  Top Layer w0.15: v1(11.85,66.425) U6.3@11.85,68.15 ; U9.4@17.25,45.625 v1(18.8,45.625)
  Bottom Layer w0.15: P3.A7@1,79.75 13.8,79.75 14.425,79.125 14.425,77.325 13.475,76.375 10.875,76.375 9.775,75.275 9.775,69.8 11.85,67.725 v1(11.85,66.425) 11.85,64.875 18.8,57.925 v1(18.8,45.625)
D2_P_A6: P3.A6 U6.2 U9.5 | length 62.3
  Top Layer w0.15: U6.2@11.2,68.15 v1(11.2,69.5) ; v1(15.7,44.975) U9.5@17.25,44.975
  Bottom Layer w0.15: P3.A6@1,80.25 14.05,80.25 14.8,79.5 14.8,76.9 13.725,75.825 11.025,75.825 10.35,75.15 10.35,70.35 v1(11.2,69.5) 19.55,61.15 19.55,45.6 18.925,44.975 v1(15.7,44.975)
EN_CC1_A5: U1.6 U7.4 | length 27.8
  Top Layer w0.15: U1.6@26.8,16.65 26.8,14.7 27.2,14.3 29.147,14.3 34.497,19.65 v1(42.11,19.65) ; v1(41.275,24.35) 41.275,25.625 41.65,26 U7.4@41.65,27.35
  Bottom Layer w0.15: v1(41.275,24.35) 42.11,23.515 v1(42.11,19.65)
EN_CC2_B5: U2.6 U7.9 | length 39
  Top Layer w0.15: U2.6@18.3,16.65 18.3,15.1 19.69,13.71 29.392,13.71 34.257,18.575 v1(43.311,18.575) ; U7.9@44.15,27.35 44.15,26.4 44.975,25.575 v1(44.975,24.65)
  Bottom Layer w0.15: v1(43.311,18.575) 44.975,20.239 v1(44.975,24.65)
EN_D1_N_A7: U3.5 U7.12 | length 51.5
  Top Layer w0.15: U3.5@9.15,16.65 9.15,15.05 10.155,14.045 11.9,14.045 12.4,13.545 18.555,13.545 19.2,12.9 29.727,12.9 33.977,17.15 v1(45.5,17.15) v1@45.538,17.15 ; U7.12@45.65,27.35 45.65,27.025 v1(46.4,26.275)
  Bottom Layer w0.15: v1(45.5,17.15) 46.385,18.035 46.385,25.064 46.4,25.079 v1(46.4,26.275)
EN_D1_P_A6: U3.13 U7.45 | length 37
  Top Layer w0.15: U3.13@7.2,22.35 7.2,25.3 8.1,26.2 23.8,26.2 24.9,27.3 34.8,27.3 37,29.5 U7.45@39.5,29.5
EN_D2_N_A7: U6.5 U7.36 | length 54.9
  Top Layer w0.15: U6.5@13.15,68.15 13.15,67.475 14.5,66.125 v1(21.514,66.125) ; v1(21.5,48.9) 26.425,48.9 29.65,45.675 29.65,39.95 35.45,34.15 U7.36@40.15,34.15
  Bottom Layer w0.15: v1@21.514,48.886 v1(21.514,66.125)
EN_D2_P_A6: U6.13 U7.32 | length 63.5
  Top Layer w0.15: U6.13@11.2,73.85 11.2,72.525 12.8,70.925 v1(22.59,70.925) ; v1(22.85,49.975) 26.825,49.975 35.175,41.625 v1(40.075,41.625) ; v1(41.887,37.488) 41.925,37.45 41.925,36.4 42.15,36.175 U7.32@42.15,34.15
  Bottom Layer w0.15: v1(22.59,70.925) 22.59,68.692 22.85,68.432 v1(22.85,49.975) ; v1(40.075,41.625) 40.075,39.3 v1(41.887,37.488)
EN_GND_A1: U1.13 U7.2 | length 22.1
  Top Layer w0.15: U1.13@24.2,22.35 24.2,25 25.42,26.22 36.02,26.22 36.8,27 v1(37.65,27) ; v1(40.648,25.677) 40.649,25.678 40.649,27.349 U7.2@40.65,27.35
  Bottom Layer w0.15: v1(37.65,27) 39.325,27 v1(40.648,25.677)
EN_GND_A12: U3.6 U7.11 | length 49.9
  Top Layer w0.15: U3.6@9.8,16.65 9.8,15.115 10.6,14.315 12.012,14.315 12.512,13.815 18.667,13.815 19.312,13.17 29.616,13.17 34.071,17.625 v1(44.787,17.625) ; U7.11@45.15,27.35 45.15,26.775 v1(45.575,26.35)
  Bottom Layer w0.15: v1(44.787,17.625) 46.115,18.953 46.115,25.176 46.13,25.191 46.13,25.795 v1(45.575,26.35)
EN_GND_B1: U2.12 U7.48 | length 26.8
  Top Layer w0.15: U2.12@16.35,22.35 16.35,24.65 17,25.3 24.082,25.3 25.272,26.49 35.54,26.49 37.05,28 U7.48@39.5,28
EN_GND_B12: U2.13 U7.47 | length 28
  Top Layer w0.15: U2.13@15.7,22.35 15.7,25.2 16.1,25.6 24,25.6 25.16,26.76 35.36,26.76 37.1,28.5 U7.47@39.5,28.5
EN_GND_EX: U6.12 U7.31 | length 64.6
  Top Layer w0.15: U6.12@11.85,73.85 11.85,72.55 12.825,71.575 v1(23.625,71.575) ; v1(23.625,50.625) 26.95,50.625 35.275,42.3 v1(40.925,42.3) ; v1(42.075,38.425) 42.475,38.025 42.475,36.25 42.65,36.075 U7.31@42.65,34.15
  Bottom Layer w0.15: v1(23.625,50.625) v1(23.625,71.575) ; v1(40.925,42.3) 40.925,40.575 40.65,40.3 40.65,39.25 41.475,38.425 v1(42.075,38.425)
EN_VBUS_A4: U1.5 U7.6 | length 29.6
  Top Layer w0.15: U1.5@26.15,16.65 26.15,14.55 26.72,13.98 29.28,13.98 34.35,19.05 v1(42.633,19.05) ; U7.6@42.65,27.35 42.65,25.85 43.05,25.45 v1(43.05,24.35)
  Bottom Layer w0.15: v1(42.633,19.05) 43.05,19.467 v1(43.05,24.35)
EN_VBUS_A9: U1.12 U7.3 | length 22.3
  Top Layer w0.15: U1.12@24.85,22.35 24.85,25.268 25.532,25.95 36.132,25.95 36.557,26.375 v1(38.65,26.375) ; v1(41.114,26.404) 41.14,26.431 41.14,27.34 U7.3@41.15,27.35
  Bottom Layer w0.15: v1(38.65,26.375) 40.05,24.975 40.575,24.975 41.15,25.55 41.15,26.368 v1(41.114,26.404)
EN_VBUS_B4: U3.12 U7.46 | length 36
  Top Layer w0.15: U3.12@7.85,22.35 7.85,25.15 8.63,25.93 23.912,25.93 25.012,27.03 35.03,27.03 37,29 U7.46@39.5,29
EN_VBUS_B9: U2.5 U7.10 | length 41.2
  Top Layer w0.15: U2.5@17.65,16.65 17.65,14.55 18.115,14.085 18.799,14.085 19.444,13.44 29.504,13.44 34.139,18.075 v1(43.942,18.075) ; U7.10@44.65,27.35 44.65,26.625 45.685,25.59 v1(45.685,25.575)
  Bottom Layer w0.15: v1(43.942,18.075) 45.685,19.818 v1(45.685,25.575)
EN_VBUS_EX: U6.6 U7.34 | length 55.2
  Top Layer w0.15: U6.6@13.8,68.15 13.8,67.475 14.525,66.75 v1(22.2,66.75) ; v1(22.2,49.475) 26.65,49.475 35.3,40.825 v1(39.55,40.825) ; v1(39.475,36.675) 39.85,36.675 41.15,35.375 U7.34@41.15,34.15
  Bottom Layer w0.15: v1(22.2,49.475) v1(22.2,66.75) ; v1(39.475,36.675) 39.475,38.325 39.55,38.4 v1(39.55,40.825)